# EAGLE board BeerCannon_backup2 (EAGLE 7.2.0)
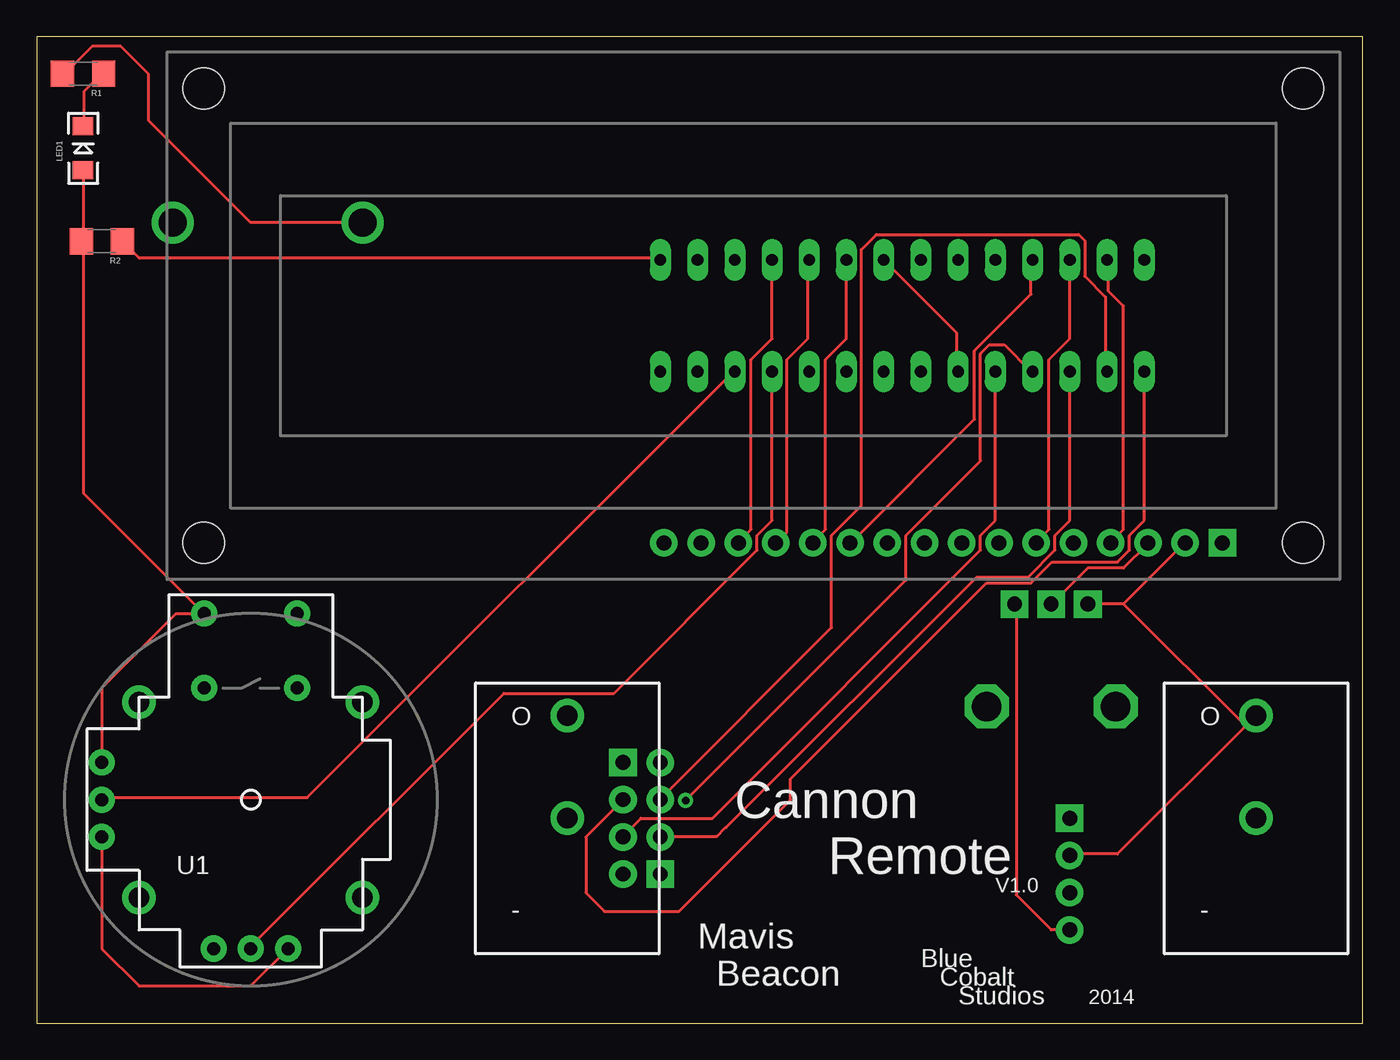
[diagram p0: board, top side]
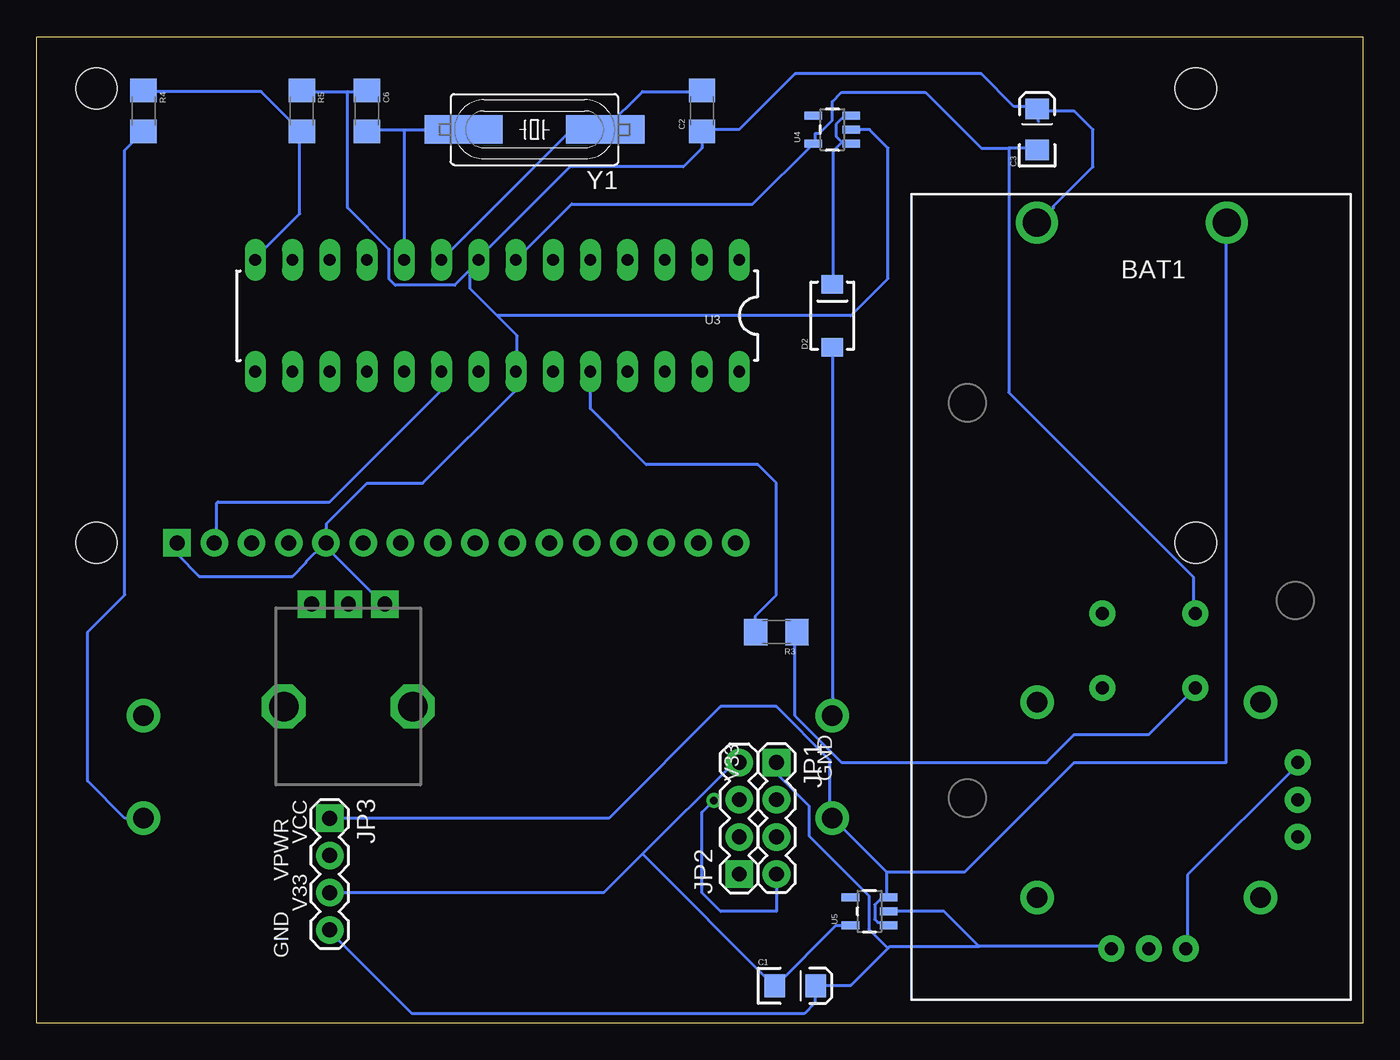
[diagram p1: board, bottom side, seen from below]

Size 90.47 x 67.3 mm. Coordinates in mm from the lower left corner, seen from the top.
Outline: 0,0 90.47,0 90.47,67.3 0,67.3 0,0
Copper layers (1*16): Top 0.035mm / dielectric 1.5mm / Bottom 0.035mm
Design rules "SparkFun *": minimum track width 8mil, minimum drill 20mil, track to track 8mil, track to pad 8mil, pad to pad 8mil, via to via 8mil, smd to smd 8mil, copper to edge 8mil, drill to drill 8mil, minimum pad ring 12mil, minimum via ring 10mil, stop-mask expansion 4mil, vias tented up to drill 20mil, thermal gap 10mil

## Footprints (pad centres in the part's own frame; a part is rotated, then mirrored left to right if it is on the bottom)
BATTCON_9V = drill 1.905: + 0,0; - 0,-12.954
EIA3216 = smd 1.4 x 1.6: A 1.4,0; C -1.4,0
1206 = smd 1.6 x 1.8: 1 -1.4,0; 2 1.4,0
SMA-DIODE = smd 1.27 x 1.47: A -2.15,0; C 2.15,0
1X04 = drill 1.016 pad 1.88 square: 1 0,0 | drill 1.016 pad 1.88: 2 2.54,0; 3 5.08,0; 4 7.62,0
LED-1206 = smd 1.2 x 1.4: A -1.5,0; C 1.5,0
ALPS_POT = drill 1 pad 1.88 square: P$1 7,-2.5; P$2 7,0; P$3 7,2.5 | drill 2 octagon: P$4 0,-4.4; P$5 0,4.4
JOYSTICK = drill 0.9 pad 1.778: B1A -3.175,12.7; B1B 3.175,12.7; B2A -3.175,7.62; B2B 3.175,7.62 | drill 0.889 pad 1.778: H1 -2.54,-10.16; H2 0,-10.16; H3 2.54,-10.16; V1 -10.16,2.54; V2 -10.16,0; V3 -10.16,-2.54 | drill 1.397 pad 2.286: MOUNT1 -7.62,6.668; MOUNT2 -7.62,-6.668; MOUNT3 7.62,-6.668; MOUNT4 7.62,6.668
LCD-16X2_NOSILK = drill 1.016 pad 1.88 square: 1 -32,15.5 | drill 1.016 pad 1.88: 2 -29.46,15.5; 3 -26.92,15.5; 4 -24.38,15.5; 5 -21.84,15.5; 6 -19.3,15.5; 7 -16.76,15.5; 8 -14.22,15.5; 9 -11.68,15.5; 10 -9.14,15.5; 11 -6.6,15.5; 12 -4.06,15.5; 13 -1.52,15.5; 14 1.02,15.5; 15 3.56,15.5; 16 6.1,15.5 | hole 2.8: -37.5,15.5; -37.5,-15.5; 37.5,15.5; 37.5,-15.5
DIL28-3 = drill 0.813 long: 1 -16.51,-3.81; 2 -13.97,-3.81; 3 -11.43,-3.81; 4 -8.89,-3.81; 5 -6.35,-3.81; 6 -3.81,-3.81; 7 -1.27,-3.81; 8 1.27,-3.81; 9 3.81,-3.81; 10 6.35,-3.81; 11 8.89,-3.81; 12 11.43,-3.81; 13 13.97,-3.81; 14 16.51,-3.81; 15 16.51,3.81; 16 13.97,3.81; 17 11.43,3.81; 18 8.89,3.81; 19 6.35,3.81; 20 3.81,3.81; 21 1.27,3.81; 22 -1.27,3.81; 23 -3.81,3.81; 24 -6.35,3.81; 25 -8.89,3.81; 26 -11.43,3.81; 27 -13.97,3.81; 28 -16.51,3.81
SOT23-5 = smd 0.55 x 1.2: 1 -0.95,-1.3; 2 0,-1.3; 3 0.95,-1.3; 4 0.95,1.3; 5 -0.95,1.3
SWITCH-SPST-VERTICAL = drill 1.4 pad 2.286: 1 0,7; 2 0,0
HC49UP = smd 5.334 x 1.93: 1 -4.826,0; 2 4.826,0

## Placement (x,y rotation side)
BAT1  [BATTCON_9V]  22.22,54.61 90 bottom
C1  [EIA3216]  38.73,2.54 0 bottom
C2  [1206]  45.09,62.23 90 bottom
C3  [EIA3216]  22.22,60.96 90 bottom
C6  [1206]  67.94,62.23 270 bottom
D2  [SMA-DIODE]  36.2,48.26 90 bottom
FRAME1  FRAME-LETTER  [CREATIVE_COMMONS]  -78.11,77.47 0 top  (outside the outline)
JP1  [1X04]  40.01,17.78 270 bottom
JP2  [1X04]  42.55,10.16 90 bottom
JP3  [1X04]  70.48,13.97 270 bottom
LED1  [LED-1206]  3.17,59.69 90 top
R1  [1206]  3.17,64.77 180 top
R2  [1206]  4.45,53.34 180 top
R3  5K  [1206]  40.01,26.67 180 bottom
R4  [1206]  83.18,62.23 270 bottom
R5  [1206]  72.39,62.23 270 bottom
RV1  [ALPS_POT]  69.21,21.59 90 bottom
U1  JOYSTICKPTH  [JOYSTICK]  14.61,15.24 0 top
U2  LCD-16X2NOSILK  [LCD-16X2_NOSILK]  48.9,48.26 180 top
U3  ATMEGA328P_PDIP  [DIL28-3]  59.05,48.26 180 bottom
U4  V_REG_LDOSMD  [SOT23-5]  36.2,60.96 90 bottom
U5  V_REG_LDOSMD  [SOT23-5]  33.66,7.62 90 bottom
U$1  SWITCH-SPST-2TV  [SWITCH-SPST-VERTICAL]  83.18,13.97 0 top
U$2  SWITCH-SPST-2TV  [SWITCH-SPST-VERTICAL]  36.2,13.97 0 top
Y1  [HC49UP]  56.52,60.96 180 bottom

## Library data of the parts
BAT1 RV1 U1 U$1 U$2 = SparkFun-Electromechanical
C1-C3 C6 R1-R5 = SparkFun-Passives
D2 = SparkFun-DiscreteSemi
FRAME1 = SparkFun-Aesthetics
JP1-JP3 = SparkFun-Connectors
LED1 = SparkFun-LED
U2 = SparkFun-Displays
U3 = SparkFun-DigitalIC
U4 U5 = SparkFun-PowerIC
Y1 = SparkFun-FreqCtrl

## Nets
A: U2.15
ANALOG1: R3.2 U3.24
ANALOG2: U1.H2 U3.25
ANALOG3: U1.V2 U3.26
CE: JP1.2 U3.15
CSN: JP2.3 U3.16
DIG6: U2.6 U3.12
DIG7: U2.4 U3.13
GND: BAT1.+ C1.A C2.1 C3.A C6.1 JP1.1 JP3.4 R1.2 R5.1 RV1.P$1 U1.H3 U1.V3 U2.1 U2.5 U3.8 U3.22 U4.2 U5.2
IRQ: JP2.1
K: U2.16
MISO: JP1.4 U3.18
MOSI: JP2.2 U3.17
N$1: LED1.C R1.1
N$2: D2.A U$2.1
N$3: R3.1 U1.B2A
N$4: R2.1 U3.1
N$5: R4.2 U$1.2
N$7: C2.2 U3.9 Y1.1
N$8: C6.2 U3.10 Y1.2
N$10: D2.C U4.1 U4.3
N$12: RV1.P$2 U2.3
N$13: R4.1 R5.2 U3.14
PIN4: U2.14 U3.4
PIN5: U2.13 U3.5
PIN6: U2.12 U3.6
PIN11: U2.11 U3.11
SCK: JP1.3 U3.19
V33: C1.C JP2.4 JP3.3 U5.5
VCC: BAT1.- JP3.1 U5.1 U5.3 U$2.2
VPWR: C3.C JP3.2 LED1.A R2.2 RV1.P$3 U1.B1A U1.H1 U1.V1 U2.2 U3.7 U3.20 U4.5 U$1.1

## Tracks (layer width: path | path; a pad name or v marks a point on that pad's centre or on a via)
ANALOG1
  Bottom 0.203: R3.2 41.43,26.77 41.43,27.79 40.01,29.21 40.01,36.83 41.27,38.1 48.9,38.1 52.71,41.91 U3.24 52.6,44.45
ANALOG2
  Top 0.203: U3.25 50.16,34.29 49.15,33.27 49.15,32.26 39.4,22.5 31.88,22.5 14.61,5.23 U1.H2
ANALOG3
  Top 0.203: U3.26 47.52,44.45 18.47,15.39 4.45,15.39 U1.V2
CE
  Top 0.203: U3.15 75.56,34.29 74.55,33.27 74.55,32.26 73.74,31.45 69.27,31.45 67.84,30.02 64.8,30.02 51.44,16.66 51.44,15.24 43.82,7.62 38.73,7.62 37.47,8.89 37.47,12.7 39.95,15.19 40.01,15.19 JP1.2
CSN
  Top 0.203: U3.16 72.92,44.45 72.92,49.53 71.5,50.95 71.5,53.39 71.09,53.8 57.28,53.8 56.26,52.78 56.26,35.31 54.23,33.27 54.23,26.98 42.65,15.39 JP2.3
DIG6
  Top 0.203: U3.12 70.48,46.68 69.06,45.26 69.06,33.68 68.25,32.87 U2.6
DIG7
  Top 0.203: U3.13 73.13,51.97 73.13,49.94 74.14,48.92 74.14,33.68 73.33,32.87 U2.4
GND
  Top 0.203: 17.04,5.03 U1.H3 14.61,2.54 6.99,2.54 4.45,5.08 U1.V3 | RV1.P$1 66.83,28.4 66.83,8.74 69.21,6.35 JP3.4 | R1.2 2.41,64.77 2.41,65.28 3.81,66.67 5.71,66.67 7.62,64.77 7.62,61.59 14.61,54.61 BAT1.+
  Bottom 0.203: 32.41,5.11 34.93,2.59 37.16,2.59 C1.A 37.36,2.39 37.36,1.37 38.1,0.64 64.87,0.64 70.48,6.25 JP3.4 | 32.41,5.11 32.28,5.23 26.19,5.23 | 32.28,7.47 U5.2 28.57,7.62 26.19,5.23 | U1.H3 17.25,5.23 26.19,5.23 | JP1.1 40.01,17.02 37.77,14.78 37.77,12.75 33.71,8.69 33.71,6.4 32.41,5.11 | 70.89,32.66 66.83,28.6 RV1.P$1 | 70.89,32.66 72.11,31.45 72.11,31.39 73.02,30.48 79.38,30.48 80.89,32 U2.1 | 70.89,32.66 U2.5 70.69,32.87 70.69,34.09 67.94,36.83 64.13,36.83 57.79,43.18 U3.22 | U4.2 34.72,60.91 34.32,60.91 34.27,60.96 33.66,60.96 32.39,59.69 32.39,50.8 34.93,48.26 59.05,48.26 | U3.22 57.68,44.45 57.68,46.89 59.05,48.26 | 22.12,61.52 22.12,62.33 C3.A | BAT1.+ 22.12,54.61 21.11,55.63 21.11,55.73 18.41,58.42 18.41,60.96 19.68,62.23 22.09,62.23 C3.A | 69.27,63.55 72.31,63.55 R5.1 | 69.27,63.55 68.05,63.55 C6.1 | U3.8 60.33,52.17 54.08,58.42 46.36,58.42 45.09,59.69 C2.1 | 69.27,63.55 69.27,55.63 66.42,52.78 66.42,50.75 66.02,50.34 61.95,50.34 60.94,51.36 | 60.94,51.36 60.33,51.97 U3.8 | C3.A 22.33,62.53 23.8,62.53 26.04,64.77 38.73,64.77 42.55,60.96 44.96,60.96 C2.1 | 45.09,60.91 C2.1 | 60.94,51.36 U3.8 | 57.89,44.45 U3.22 | 60.94,51.36 60.94,50.14 59.05,48.26
MISO  (via drill 0.51)
  Top 0.203: v44.27,15.19 59.31,30.23 59.31,33.27 64.39,38.35 64.39,45.67 65,46.28 66.02,46.28 67.84,44.45 U3.18
  Bottom 0.203: 40.01,10.31 JP1.4 40.01,7.62 43.82,7.62 45.09,8.89 45.09,14.38 v44.27,15.19
MOSI
  Top 0.203: U3.17 70.48,34.29 69.47,33.27 69.47,32.26 67.64,30.43 64.13,30.43 47.04,13.34 46.99,13.34 46.41,12.75 42.65,12.75 JP2.2
N$1
  Top 0.203: LED1.C 3.23,61.32 3.23,63.55 4.45,64.77 R1.1
N$2
  Bottom 0.203: D2.A 36.14,46.08 36.14,21.08 U$2.1
N$3
  Bottom 0.203: 38.58,26.57 R3.1 38.73,26.54 38.73,20.96 35.56,17.78 21.59,17.78 19.68,19.68 14.61,19.68 U1.B2A 11.56,22.71
N$4
  Top 0.203: 5.87,53.19 R2.1 7.01,52.17 42.44,52.17 U3.1
N$5
  Bottom 0.203: U$1.2 84.45,13.97 86.99,16.51 86.99,26.67 84.45,29.21 84.45,59.56 R4.2
N$7
  Bottom 0.203: C2.2 45.09,63.55 49.15,63.55 51.59,61.11 Y1.1 51.79,60.91 54.03,60.91 U3.9
N$8
  Bottom 0.203: 65.41,60.91 61.34,60.91 Y1.2 | 65.41,60.91 67.84,60.91 C6.2 | 65.41,60.91 U3.10
N$10
  Bottom 0.203: 35.54,60.1 34.93,60.1 U4.1 | 35.54,60.1 35.94,60.5 35.94,61.32 35.54,61.72 34.93,61.72 U4.3 | 35.54,60.1 36.14,59.49 36.14,50.55 D2.C
N$12
  Top 0.203: RV1.P$2 69.27,28.6 71.7,31.04 74.14,31.04 75.77,32.66 U2.3
N$13
  Bottom 0.203: U3.14 75.56,52.17 72.52,55.22 72.52,60.71 R5.2 72.52,60.91 75.16,63.55 83.08,63.55 R4.1
PIN4
  Top 0.203: U3.4 50.16,46.68 48.74,45.26 48.74,33.68 47.93,32.87 U2.14
PIN5
  Top 0.203: U3.5 52.6,51.97 52.6,46.68 51.18,45.26 51.18,33.48 50.57,32.87 U2.13
PIN6
  Top 0.203: U3.6 55.25,46.68 53.82,45.26 53.82,33.68 53.01,32.87 U2.12
PIN11
  Top 0.203: U3.11 67.84,51.97 67.84,49.73 63.98,45.87 63.98,41.2 55.65,32.87 U2.11
SCK
  Top 0.203: U3.19 65.41,34.29 64.39,33.27 64.39,32.26 46.1,13.97 41.22,13.97 40.01,12.75 JP1.3
V33
  Bottom 0.203: U5.5 35.13,6.65 35.94,6.65 40.01,2.59 C1.C 40.21,2.59 49.15,11.53 | JP3.3 51.79,8.89 49.15,11.53 | 49.15,11.53 43.05,17.63 42.65,17.63 JP2.4
VCC
  Bottom 0.203: U5.1 32.49,6.86 33.1,6.86 33.3,7.06 33.3,8.08 32.89,8.48 32.49,8.48 U5.3 32.49,8.69 32.49,10.31 | 32.49,10.31 36.14,13.97 U$2.2 36.35,13.97 36.35,17.93 40.01,21.59 43.82,21.59 51.44,13.97 JP3.1 | BAT1.- 9.32,54.61 9.32,17.78 19.68,17.78 27.15,10.31 32.49,10.31
VPWR
  Top 0.203: LED1.A 3.23,58.06 3.23,53.39 R2.2 3.23,53.19 3.23,36.12 11.15,28.19 | 11.15,28.19 11.35,27.99 U1.B1A | U1.V1 4.45,22.86 9.53,27.94 U1.B1A | 11.15,28.19 U1.B1A | 82.47,20.27 83.08,20.88 U$1.1 82.47,20.27 | 82.47,20.27 73.74,11.53 70.48,11.53 JP3.2 | U3.7 62.76,47.09 62.76,44.45 U3.20 | 74.14,28.6 71.91,28.6 RV1.P$3 | 74.14,28.6 78.21,32.66 U2.2 | 74.14,28.6 82.47,20.27
  Bottom 0.203: U1.H1 11.96,5.23 11.96,10.11 4.45,17.63 U1.V1 | 24.15,59.69 22.33,59.69 C3.C | U4.5 37.36,60.1 37.36,60.71 37.08,60.71 36.2,61.59 36.2,62.87 35.56,63.5 29.84,63.5 26.04,59.69 24.15,59.69 | 62.97,44.45 U3.20 62.87,43.18 70.48,35.56 78.1,35.56 78.21,35.46 78.21,32.87 U2.2 | U3.7 53.98,55.88 41.62,55.88 U4.5 | 37.57,59.89 U4.5 | 24.15,59.69 24.15,43.03 11.56,30.43 11.56,27.99 U1.B1A

## Text on the board
tPlace: Cannon | Remote | V1.0 | Mavis | Blue | Beacon | Cobalt | Studios | 2014
bPlace: GND | V33 | VCC | VPWR | V33 | GND